# Altium PCB mcuv2.PcbDoc (part 2 of 2)
Units mil, origin at the board's own origin, x right, y up, seen from the top; angles counter-clockwise.
Board outline 3149.61 x 3149.61 mil, 2 copper layers (Top Layer, Bottom Layer); 116 components, 121 nets, 455 pads, 59 vias.
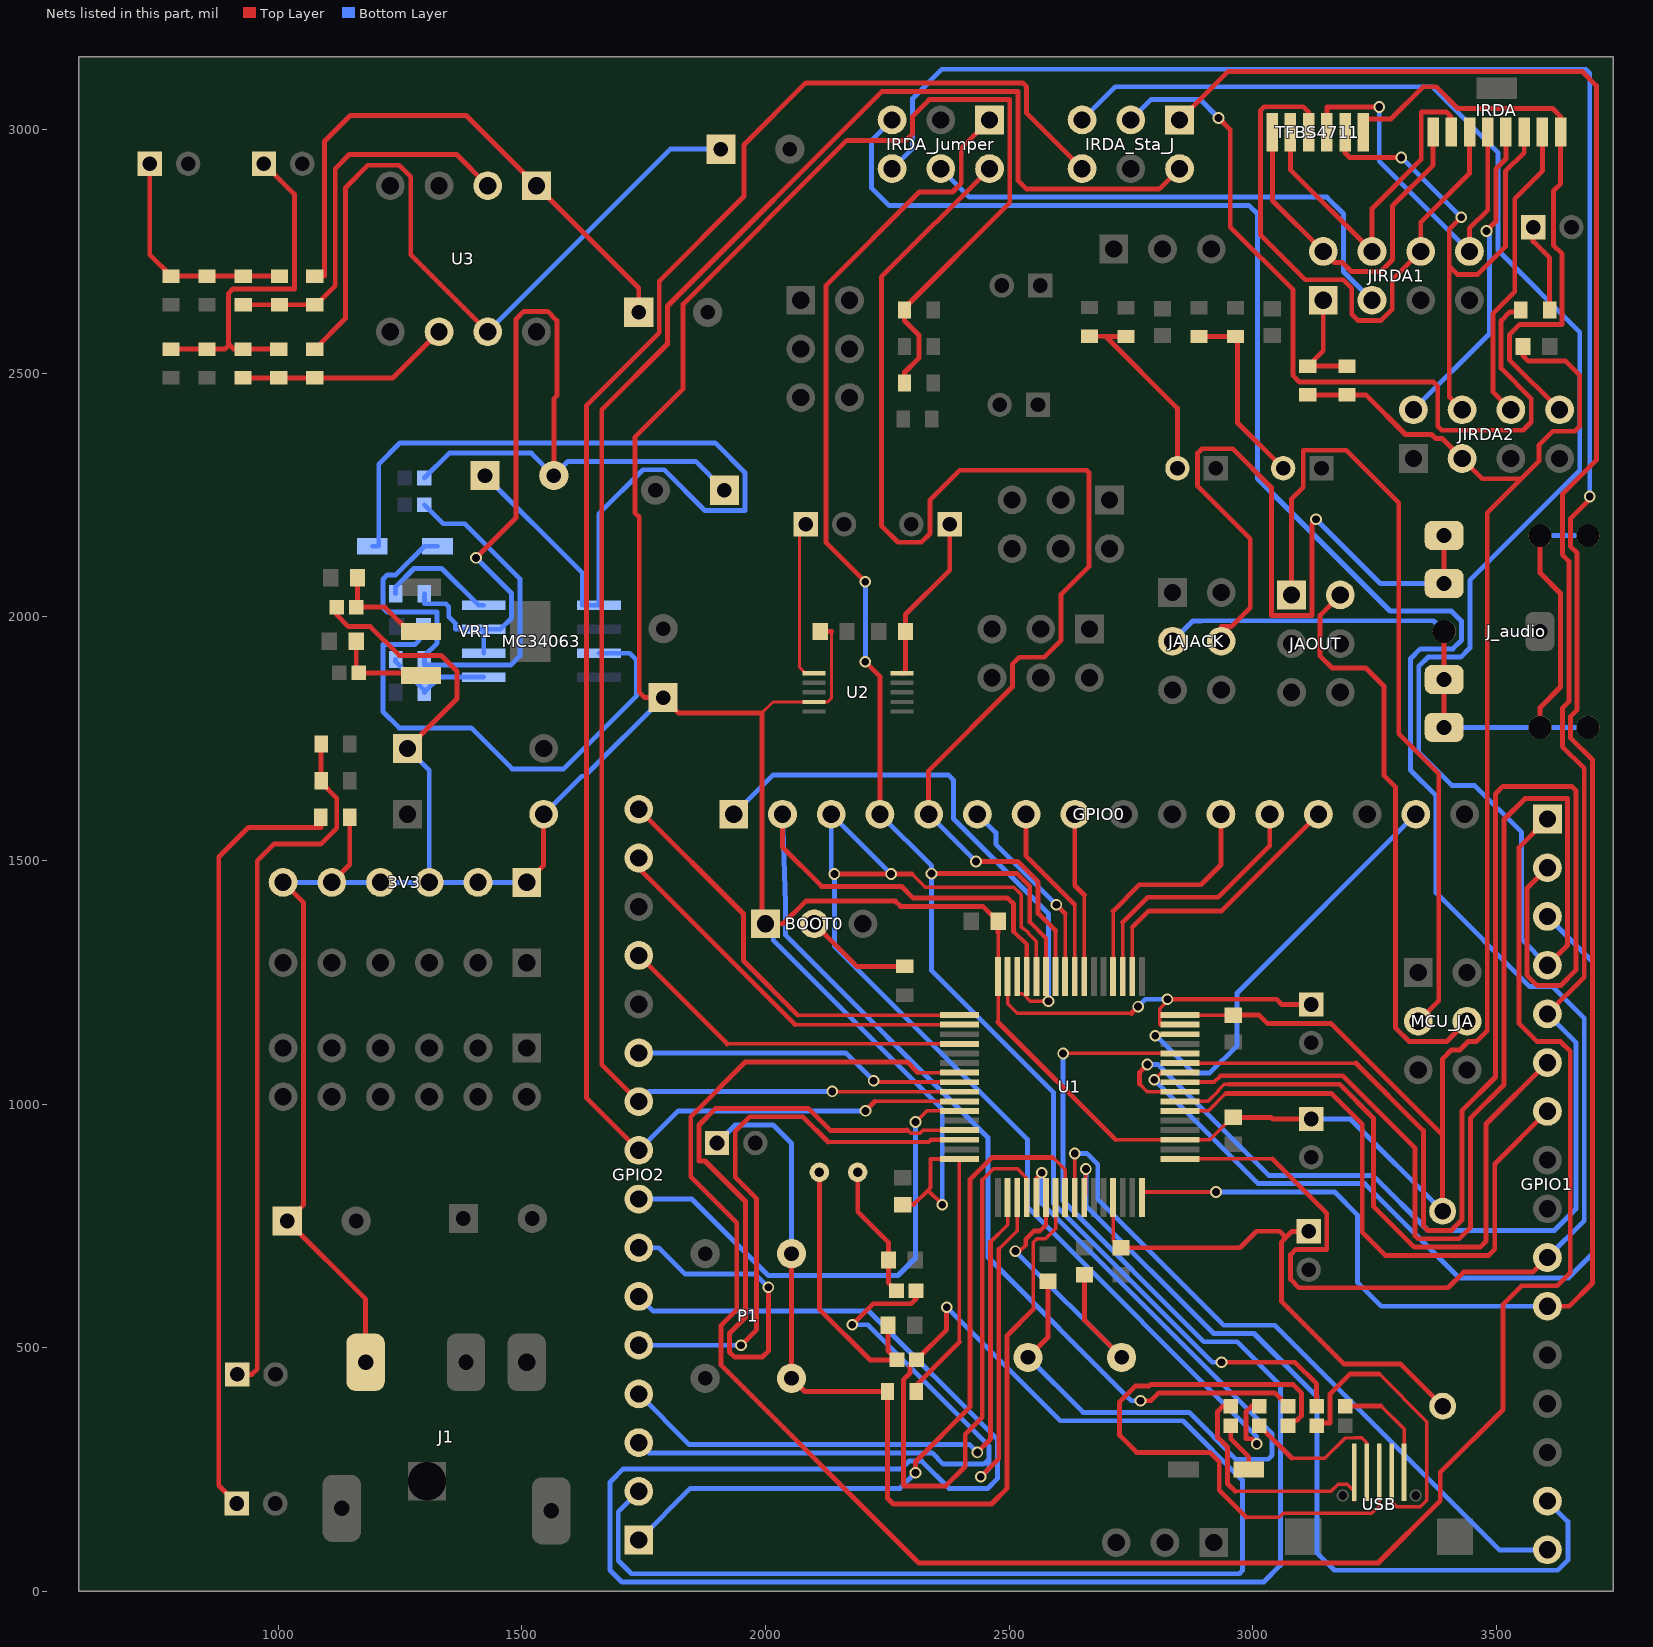
[diagram p2: the nets of this part, all layers, seen from the top]

## Via types
v1: diameter 24, hole 16, Top Layer to Bottom Layer, 59 vias

## Nets (pads, with @x,y where several pads share a name; then routed paths per layer and width w, separated by ;. In a path a pad name is that pad's centre, name@x,y a point inside that pad or via, vN(x,y) a via of type N, cw(c..) or ccw(c..) an arc to the next point about the centre after c; other vN are vias at no path point) (continued)
IRDA_SHOT: IRDA_Sta_J.3 R13.1 | length 1681.4
  Top Layer w10: v1(2930,3024) 2954,3000 2954,2800 3083,2671 3083,2495 3096,2482 3371,2482 3380,2473 3380,2391 3388,2383 3555,2383 3572,2400 3572,2448 3510.13,2509.87 3510.13,2608 3528.13,2626 3550.47,2626 R13.1@3550.47,2630
  Bottom Layer w10: IRDA_Sta_J.3@2750,3020 2792,3062 2892,3062 v1(2930,3024)
IRDA_TXD: IRDA_Jumper.4 JIRDA1.3 | length 1066.5
  Bottom Layer w10: IRDA_Jumper.4@2360,2920 2418.53,2861.47 3152.53,2861.47 3186.53,2827.47 3186.53,2708.47 JIRDA1.3@3245,2650
MCU_AOUTL: JAOUT.1 MCU_JA.3 | length 1663
  Top Layer w10: JAOUT.1@3080,2045 3080,2242 3104,2266 3104,2342 3192,2342 3300,2234 3300,1760 3382,1678 3382,1212 MCU_JA.3@3340,1170
MCU_AOUTR: JAOUT.2 MCU_JA.4 | length 1186.4
  Top Layer w10: JAOUT.2@3180,2045 3138.53,2003.53 3138.53,1986.47 3138,1985.94 3138,1920 3163,1895 3232,1895 3270,1857 3270,1674 3293,1651 3293,1157 3322,1128 3398,1128 MCU_JA.4@3440,1170
NetBOOT0_2: BOOT0.2 R3.2 | length 222.2
  Top Layer w10: BOOT0.2@2100,1370 2187.47,1282.53 R3.2@2286,1282.53
NetC6_1: C6.1 C7.2 R1.2 U1.13 | length 1075.8
  Top Layer w7.2: U1.13@2713.58,808.62 2713.58,719.45 C7.2@2728.03,705
  Top Layer w10: C7.2@2728.03,705 C7.2@2730,705 2974,705 3008,739 3055.29,739 3068.16,726.13 ; C6.1@3115,738.74 3080.77,738.74 3068.16,726.13 ; R1.2@3390,380 3303.21,466.79 3187.21,466.79 3059.43,594.57 3059.43,717.41 3068.16,726.13
NetC8_1: C8.1 U1.31 U1.47 | length 805
  Top Layer w7.2: U1.47@2497.05,1261.38 2497.05,1205.95 2517,1186 2751,1186 ; v1@2829,1215 2809.45,1195.45 2809.45,1163.1 U1.31@2851.38,1162.95
  Top Layer w10: 2751,1186 v1(2765,1200) ; v1(2825,1215) 2829,1215 3049.37,1215 3060,1204.37 C8.1@3120,1204.37
  Bottom Layer w10: v1(2765,1200) 2780,1215 v1(2825,1215)
NetC11_2: C11.2 J_VR1_IN.2 VR1.3 | length 197.2
  Top Layer w10: C11.2@1160,1950 1160,1890 J_VR1_IN.2@1165,1885 1287.24,1885 VR1.3@1292.8,1879.45
NetC12_2: C12.2 J_VR1_OUT.1 VR1.2 | length 214.6
  Top Layer w10: C12.2@1162.56,2080 1162.56,2022.56 J_VR1_OUT.1@1160,2020 1219,2020 1269,1970 VR1.2@1292.8,1970
NetC20_2: C20.2 C21.1 U2.5 | length 350.4
  Top Layer w10: U2.5@2280,1884.37 2286.99,1884.37 2287.56,1884.94 C20.2@2287.56,1970 2287.56,2005 2378.23,2095.67 C21.1@2378.23,2190
NetC22_1: C22.1 U2.6 | length 333.8
  Top Layer w6: C22.1@2070.03,2177.4 2070.03,1896.34 2082,1884.37 U2.6@2100,1884.37
  Top Layer w10: C22.1@2070.03,2177.4 C22.1@2082.63,2190
NetC25_2: C25.2 R5.2 R7.1 | length 388.2
  Top Layer w10: R5.2@2890,2575.47 R7.1@2965,2575.47 2969,2575.47 2969,2398.53 C25.2@3062.53,2305
NetC26_2: C26.2 R4.2 R6.1 | length 440.1
  Top Layer w10: R6.1@2740,2575.47 2698.53,2575.47 ; C26.2@2845.67,2305 2845.67,2428.33 2698.53,2575.47 ; 2698.53,2575.47 2698.06,2575.94 R4.2@2665,2575.94 2698.53,2575.47
NetC32_2: C32.2 MC34063.3 | length 1035.1
  Bottom Layer w10: C32.2@1298.03,1980 1298.03,1961.03 1280,1943 1215,1943 1215,1805 1248,1772 1396,1772 1480,1688 1586,1688 1735,1837 1735,1912 1721.61,1925.39 MC34063.3@1658.11,1925.39
NetC33_1: C33.1 R18.1 R19.2 R20.2 R26.2 | length 471.3
  Top Layer w10: C33.1@736.26,2930 736.26,2743.27 R18.1@780,2699.53 R19.2@853.86,2699.53 R20.2@928.29,2699.53 R26.2@1002.72,2699.53
NetC34_1: C34.1 R22.1 R23.2 R24.2 R27.2 | length 756.9
  Top Layer w10: R22.1@780,2549.53 R23.2@853.75,2549.53 890,2549.53 898,2557.53 898,2560 ; C34.1@970.63,2930 1033,2867.63 1033,2673 907,2673 898,2664 898,2560 ; R24.2@1001.25,2549.53 R27.2@927.5,2549.53 908.47,2549.53 898,2560
NetC35_1: C35.1 R25.1 U3.7 | length 1537.9
  Top Layer w10: R25.1@1075,2549.53 1138,2612.53 1138,2881 1184,2927 1248,2927 1272,2903 1272,2743 U3.7@1430,2585
  Bottom Layer w10: U3.7@1430,2585 1805,2960 C35.1@1908.6,2960
NetC36_1: C36.1 R21.1 U3.1 | length 1160.1
  Top Layer w10: R21.1@1075,2699.53 1095,2699.53 1095,2976 1148,3029 1386,3029 U3.1@1530,2885 1740,2675 C36.1@1740,2625
NetC37_1: C37.1 J_VR2_IN.1 L1.2 MC34063.6 MC34063.7 R15.2 | length 2088
  Top Layer w10: v1(1406,2121) 1488,2203 1488,2611 1504,2627 1553,2627 1572,2608 1572,2454 1565.7,2447.7 L1.2@1565.7,2290
  Bottom Layer w10: R15.2@1300,2047.5 1300,2027 1344,2027 1349.89,2021.11 1349.89,2009.2 1350,2009.09 1350,2000 1364,1986 1364,1974.61 MC34063.7@1421.89,1974.61 ; J_VR2_IN.1@1300,2285 1351,2336 1519.7,2336 L1.2@1565.7,2290 1594.7,2319 1856.7,2319 C37.1@1915.7,2260 ; v1(1406,2121) 1479,2048 1479,1997.61 1456,1974.61 MC34063.7@1421.89,1974.61 ; MC34063.6@1421.89,1925.39 MC34063.7@1421.89,1974.61
NetD1_1: D1.1 R13.2 | length 184
  Top Layer w10: D1.1@3575.63,2800 3575.63,2770.74 3609.53,2736.84 R13.2@3609.53,2630
NetD4_1: D4.1 JUSB_V5.1 | length 105.3
  Top Layer w10: JUSB_V5.1@2955,340 2955,312.93 2991.93,276 D4.1@2991.93,250
NetD5_1: D5.1 R12.2 | length 1598
  Top Layer w10: D5.1@915,180 878,217 878,1507 939,1568 1087.6,1568 R12.2@1087.6,1588.78
NetD6_1: D6.1 R13A.2 R13B.2 | length 1465.7
  Top Layer w10: D6.1@915.63,445 946,445 957,456 957,1499 992,1534 1088,1534 1120,1566 1120,1628.07 1088.07,1660 R13A.2@1088.07,1663.78 R13B.2@1088.07,1738.78
NetD7_1: D7.1 L1.1 MC34063.1 | length 1997.3
  Bottom Layer w10: D7.1@1193.16,2145 1206.18,2145 1206.18,2313.18 1250,2357 1897,2357 1958,2296 1958,2218 1876,2218 1792,2302 1748.76,2302 1658,2211.24 MC34063.1@1658,2023.82 ; L1.1@1424.3,2290 1624,2090.3 1624,2023.82 MC34063.1@1658,2023.82 ; MC34063.1@1658.11,2023.82 MC34063.1@1658,2023.82
NetD7_2: D7.2 J_VR2_OUT.1 R16.2 | length 1053.5
  Bottom Layer w10: J_VR2_OUT.1@1300,2230 1339,2191 1383.04,2191 1496,2078.04 1496,1920 1477,1901 1300,1901 R16.2@1300,1912.5 1300,1920 1326,1946 1326,2010 1224,2010 1215,2019 1215,2077 1224,2086 1241.26,2086 1300.26,2145 D7.2@1327.01,2145
NetIRDA_1: IRDA.1 JIRDA2.8 TFBS4711.6 | length 1238.5
  Top Layer w10: TFBS4711.6@3227.2,2995 3227.2,3022 3284,3022 3350,3088 3376.73,3088 3421.34,3043.39 3615.61,3043.39 3632.21,3026.79 IRDA.1@3632.21,2995 3632.21,2889 3617.37,2874.16 3617.37,2763 3635.31,2745.06 3635.31,2600.28 3548.28,2600.28 3527.13,2579.13 3527.13,2527.87 JIRDA2.8@3630,2425
NetIRDA_2: IRDA.2 JIRDA2.6 | length 627.4
  Top Layer w10: JIRDA2.6@3530,2425 3493.13,2461.87 3493.13,2622.13 3538,2667 3538,2858.2 3594.8,2915 IRDA.2@3594.8,2995
NetIRDA_3: IRDA.3 JIRDA2.4 TFBS4711.5 | length 1148.9
  Top Layer w10: TFBS4711.5@3189.8,2995 3189.8,2952 3198.8,2943 v1(3305,2943) ; v1(3428,2820) 3403.47,2795.47 3403.47,2719.53 ; JIRDA2.4@3430,2425 3403.47,2451.53 3403.47,2719.53 ; IRDA.3@3557.4,2995 3557.4,2953 3518.8,2914.4 3518.8,2759.8 3462,2703 3420,2703 3403.47,2719.53
  Bottom Layer w10: v1(3305,2943) v1(3428,2820)
NetIRDA_4: IRDA.4 JIRDA2.2 | length 654.1
  Top Layer w10: v1(3480,2792) 3499.6,2811.6 3499.6,2919.6 3520,2940 IRDA.4@3520,2995
  Bottom Layer w10: JIRDA2.2@3330,2425 3486.53,2581.53 3486.53,2785.47 v1(3480,2792)
NetIRDA_5: IRDA.5 JIRDA1.8 TFBS4711.4 | length 792.7
  Top Layer w10: TFBS4711.4@3152.4,2995 3152.4,3046.47 v1(3259.91,3046.47) ; JIRDA1.8@3445,2750 3445,2797.2 3482.6,2834.8 IRDA.5@3482.6,2995
  Bottom Layer w10: v1(3259.91,3046.47) 3259.91,2935.09 JIRDA1.8@3445,2750
NetIRDA_6: IRDA.6 JIRDA1.6 TFBS4711.3 | length 1216.5
  Top Layer w10: TFBS4711.3@3115,2995 3115,3036 3104,3047 3024,3047 3016,3039 3016,2784 3108,2692 3185.94,2692 3203.47,2674.47 3203.47,2621 3216,2608.47 3264,2608.47 3286.53,2631 3286.53,2691.53 JIRDA1.6@3345,2750 3345,2810.08 3445.2,2910.28 IRDA.6@3445.2,2995
NetIRDA_7: IRDA.7 JIRDA1.4 TFBS4711.2 | length 739.9
  Top Layer w10: TFBS4711.2@3077.6,2995 3077.6,2917.4 JIRDA1.4@3245,2750 3245,2838 3346,2939 3346,3036.53 3397.27,3036.53 3407.8,3026 IRDA.7@3407.8,2995
NetIRDA_8: IRDA.8 JIRDA1.2 TFBS4711.1 | length 754.2
  Top Layer w10: TFBS4711.1@3040.39,2995 3040.39,2854.61 JIRDA1.2@3145,2750 3168,2727 3184.47,2727 3203,2708.47 3262.47,2708.47 3287,2733 3287,2843.61 3370.39,2927 IRDA.8@3370.39,2995
NetJ_audio_2: J_audio.0 J_audio.2 J_audio.3 JAJACK.3 | length 1603.2
  Top Layer w10: J_audio.2@3393.15,1773.15 J_audio.3@3393.15,1871.57 J_audio.0@3393.15,1970 ; J_audio.0@3590,1773.15 3590,1813.97 3632,1855.97 3632,2048 3590,2090 J_audio.0@3590,2166.85
  Bottom Layer w10: JAJACK.3@2835.55,1950 2877.02,1991.47 2894.08,1991.47 2894.6,1992 3371.15,1992 J_audio.0@3393.15,1970 ; J_audio.2@3393.15,1773.15 J_audio.0@3590,1773.15 J_audio.0@3688.43,1773.15 ; J_audio.0@3590,2166.85 J_audio.0@3688.43,2166.85
NetJ_audio_3: J_audio.4 J_audio.5 JAJACK.4 | length 1618.3
  Top Layer w10: JAJACK.4@2935.55,1950 2935.55,1980 2956.04,1980 2995,2018.96 2995,2160 2887,2268 2887,2336 2896,2345 2959,2345 3038.47,2265.53 3038.47,2003 3121.53,2003 3121.53,2191.95 v1(3130,2200.43) ; J_audio.4@3393.15,2068.43 J_audio.5@3393.15,2166.85
  Bottom Layer w10: v1(3130,2200.43) 3262,2068.43 J_audio.4@3393.15,2068.43
NetJIRDA1_1: JIRDA1.1 R8A.1 R8B.1 | length 229.4
  Top Layer w10: JIRDA1.1@3145,2650 3145,2546.45 R8B.1@3113.08,2514.53 R8A.1@3193.78,2514.53
NetJUSB_DM_2: JUSB_DM.2 USB.4 | length 330.5
  Top Layer w7: 3080.75,273 3148.16,273 3189.66,314.5 3209.35,314.5 3209.85,315 3224,315 3234.21,304.79 USB.4@3234.21,244.15
  Top Layer w10: JUSB_DM.2@3013.75,340 3080.75,273
NetJUSB_DP_2: JUSB_DP.2 USB.3 | length 1261.5
  Top Layer w7: 2987,152 3054.69,152 3062.54,159.85 3244.85,159.85 3259.8,174.8 USB.3@3259.8,244.15
  Top Layer w10: 2987,152 2931.43,207.57 2931.43,265.57 2912,285 2762,285 2727,320 2727,388.96 2759.04,421 2787.06,421 2790.06,424 3083,424 3100,407 3100,360 3090,350 3082.5,350 JUSB_DP.2@3072.5,340
NetJUSB_GND_2: JUSB_GND.2 USB.1 | length 229.3
  Top Layer w7: 3264,380 3310.98,333.02 USB.1@3310.98,244.15
  Top Layer w10: JUSB_GND.2@3190,380 3264,380
NetJUSB_OTG_2: JUSB_OTG.2 USB.2 | length 649.2
  Top Layer w7: 3259.58,446 3357.61,347.98 3357.61,187.07 3344.13,173.6 3295.8,173.6 3285.39,184 USB.2@3285.39,244.15
  Top Layer w10: JUSB_OTG.2@3131.25,340 3136.25,345 3159,345 3159,405 3200,446 3259.58,446
NetJUSB_V5_2: JUSB_V5.2 USB.5 | length 484.9
  Top Layer w7: 2964.43,205 3160.88,205 3175.47,219.6 3194.53,219.6 3208,206.12 USB.5@3208,187.07
  Top Layer w10: JUSB_V5.2@2955,380 2939,380 2928,369 2928,315.89 2948.43,295.46 2948.43,221 2964.43,205
NetMC34063_5: MC34063.5 R16.1 R17.2 | length 226.8
  Bottom Layer w10: R16.1@1240.94,1912.5 1240.94,1908.06 1300,1849 R17.2@1300,1845 1331.18,1876.18 MC34063.5@1421.89,1876.18
NetMC34063_8: MC34063.8 R15.1 | length 241.9
  Bottom Layer w10: R15.1@1240.94,2047.5 1240.94,2061.65 1278.56,2099.27 1335.73,2099.27 1411.18,2023.82 MC34063.8@1421.89,2023.82
NetR20_1: R20.1 R21.2 R26.1 U3.2 | length 796.9
  Top Layer w10: R20.1@928.29,2640.47 R26.1@1002.72,2640.47 R21.2@1075,2640.47 1078,2640.47 1117,2679.47 1117,2920 1146,2949 1366,2949 U3.2@1430,2885
NetR24_1: R24.1 R25.2 R27.1 U3.6 | length 441.7
  Top Layer w10: R27.1@927.5,2490.47 R24.1@1001.25,2490.47 R25.2@1075,2490.47 1235.47,2490.47 U3.6@1330,2585
OSC32_IN: C18.2 JO32I.2 Y2.1 | length 562.2
  Top Layer w10: Y2.1@2110.63,860 2110.63,578.94 2214.57,475 JO32I.2@2270,475 2251.44,493.56 C18.2@2251.44,546
OSC32_OUT: C19.2 JO32O.2 Y2.2 | length 276
  Top Layer w10: Y2.2@2189.37,860 2189.37,779.07 2252.44,716 C19.2@2252.44,680 2252.44,633.56 JO32O.2@2269,617
OSC_IN: C16.2 U1.5 Y1.1 | length 1595.2
  Top Layer w7.2: U1.5@2556.1,808.62 2556.1,848.1 v1(2567,859)
  Top Layer w10: Y1.1@2538.94,480 2580,521.06 C16.2@2580,636.44
  Bottom Layer w10: Y1.1@2538.94,480 2651.94,367 2869.56,367 2965.56,271 3032,271 3040,279 3040,323.03 2567,796.03 v1(2567,859)
OSC_OUT: C17.2 U1.6 Y1.2 | length 658.6
  Top Layer w8.4: v1@2521.53,698.06 2534.4,710.93 ; 2563.07,739.6 2565.89,742.42 2566.74,742.42 2573.3,748.98 2573.3,749.83 2575.79,752.32 U1.6@2575.79,808.62
  Top Layer w10: v1(2513,698.06) v1@2521.53,698.06 ; 2534.4,710.93 2534.4,722.46 2551.54,739.6 2563.07,739.6 ; C17.2@2655,649.88 2655,556.06 Y1.2@2731.06,480
  Bottom Layer w10: v1(2513,698.06) Y1.2@2731.06,480
PA2: GPIO1.11 IRDA_Jumper.6 U1.16 | length 5242.7
  Top Layer w8.4: U1.16@2772.64,808.62 2772.64,819.63 v1(2924.83,819.63)
  Top Layer w10: GPIO1.11@3605,585 3649.92,585 3697.53,632.61 3697.53,1706.47 3652.8,1751.2 3652.8,1795.8 3666,1809 3666,2131 3652.8,2144.2 3652.8,2202 3692,2241.2 v1(3692,2247.1)
  Bottom Layer w10: IRDA_Jumper.6@2260,2920 2302,2962 2302,3064 2362,3124 3684.03,3124 ; v1(2924.83,819.63) 3168,819.63 3215,772.63 3215,634 3264,585 GPIO1.11@3605,585 ; 3684.03,3123.97 3692,3116 v1(3692,2247.1)
PA3: GPIO1.10 IRDA_Jumper.5 U1.17 | length 4760
  Top Layer w7.2: U1.17@2851.38,887.36 3040.64,887.36
  Top Layer w10: 3040.64,887.36 3152,776 3152,701.74 3088.74,701.74 3078,691 3078,640 3095,623 3401,623 3433,655 3575,655 GPIO1.10@3605,685
  Bottom Layer w10: IRDA_Jumper.5@2260,3020 2218,2978 2218,2880 2254,2844 2993,2844 3010,2827 3010,2284 3282,2012 3408,2012 3428.77,1991.23 3428.77,1952 3411.15,1934.38 3344,1934.38 3324,1914.38 3324,1685 3376.53,1632.47 3376.53,1433.47 3569,1241 3616,1241 3680.53,1176.47 3680.53,760.53 GPIO1.10@3605,685
PA6: GPIO1.7 U1.22 | length 1261.5
  Top Layer w7.2: U1.22@2851.38,985.79 2908.79,985.79 2945,1022
  Top Layer w10: 2945,1022 3161.54,1022 3225,958.54 3225,737 3273,689 3484,689 3497,702 3497,877 GPIO1.7@3605,985
PA7: GPIO1.6 U1.23 | length 1311.5
  Top Layer w7.2: U1.23@2851.38,1005.47 2908.39,1005.47 2929.4,1026.48 2929.4,1028.46 2941.46,1040.52 2950.52,1040.52
  Top Layer w10: 2950.52,1040.52 3178.54,1040.52 3247.8,971.26 3247.8,790.4 3331.76,706.44 3467.26,706.44 3479,718.18 3479,959 GPIO1.6@3605,1085
PA8: GPIO0.6 U1.41 | length 408.2
  Top Layer w7.2: U1.41@2615.16,1261.38 2615.16,1391
  Top Layer w10: v1(2597.16,1409) 2615.16,1391
  Bottom Layer w10: GPIO0.6@2435,1595 2472.94,1557.06 2472.94,1533.22 v1(2597.16,1409)
PA9: GPIO0.5 IRDA_Jumper.2 U1.42 | length 2727.6
  Top Layer w8.4: U1.42@2595.47,1261.38 2595.47,1355.53
  Top Layer w10: GPIO0.5@2335,1595 2335,1684 2507,1856 2507,1903 2521,1917 2572,1917 2607,1952 2607,2046 2664,2103 2664,2296 2659,2301 2399,2301 2338,2240 2338,2171 2320,2153 2272,2153 2238,2187 2238,2698 IRDA_Jumper.2@2460,2920 ; v1(2432,1498) 2517.6,1498 2559.6,1456 2559.6,1391.4 2595.47,1355.53
  Bottom Layer w10: GPIO0.5@2335,1595 v1(2432,1498)
PA10: GPIO0.4 IRDA_Jumper.1 JUSB_OTG.1 U1.43 | length 3747.5
  Top Layer w8.4: 2542.6,1373.5 2575.79,1340.32 U1.43@2575.79,1261.38
  Top Layer w10: v1(2205,1908) 2235,1878 GPIO0.4@2235,1595 ; v1(2205,2072) 2124,2153 2124,2680 2316,2872 2384,2872 2402,2890 2402,2962 IRDA_Jumper.1@2460,3020 ; v1(2341,1473) 2516.83,1473 2542.6,1447.23 2542.6,1373.5 ; v1(2936.07,470) 3086.77,470 3131.25,425.52 JUSB_OTG.1@3131.25,380
  Bottom Layer w10: v1(2205,1908) v1(2205,2072) ; GPIO0.4@2235,1595 2341,1489 v1(2341,1473) 2341,1274 2591,1024 2591,796.07 2917.07,470 v1(2936.07,470)
PA11: GPIO0.3 JUSB_DM.1 U1.44 | length 2526.6
  Top Layer w7.2: 2301,1472 2328,1445 2510,1445 2525,1430 2525,1363.13 2539.38,1352.68 2539.38,1350.7 2556.1,1333.98 U1.44@2556.1,1261.38
  Top Layer w10: v1(2141.53,1472) v1(2258,1472) 2301,1472 ; v1(3008.5,302.5) 2998,313 2986,313 2986,368 2998,380 JUSB_DM.1@3013.75,380
  Bottom Layer w10: v1(2258,1472) GPIO0.3@2135,1595 2135,1478.53 v1(2141.53,1472) 2141.53,1323.47 2538,927 2538,788 3008.5,317.5 v1(3008.5,302.5)
  other v1: 2141.53,1472
PA12: GPIO0.2 JUSB_DP.1 U1.45 | length 2588.3
  Top Layer w8.4: 2509.4,1354.17 2536.42,1327.15 U1.45@2536.42,1261.38
  Top Layer w10: GPIO0.2@2035,1595 2035,1527 2115.2,1446.8 2279.2,1446.8 2303.28,1422.72 2497.18,1422.72 2509.4,1410.51 2509.4,1354.17 ; v1(2770,391) 2791.06,391 2807.06,407 3045.5,407 JUSB_DP.1@3072.5,380
  Bottom Layer w10: GPIO0.2@2035,1595 2041.53,1412 2041.53,1346.47 2456.78,931.22 2456.78,685.22 2751,391 v1(2770,391)
PA13: GPIO0.1 U1.46 | length 1127.4
  Top Layer w7.2: U1.46@2516.73,1261.38 2516.73,1228.06 2530.42,1224.98 2543.64,1210.78 v1(2581,1210.78)
  Bottom Layer w10: GPIO0.1@1935,1595 2015,1675 2376,1675 2386,1665 2386,1585.27 2581,1390.27 v1(2581,1210.78)
PA14: GPIO2.16 U1.49 | length 889.8
  Top Layer w7.2: 2066.36,1182.64 U1.49@2398.62,1182.64
  Top Layer w10: GPIO2.16@1740,1605 1955,1390 1955,1294 2066.36,1182.64
PA15: GPIO2.15 U1.50 | length 812.6
  Top Layer w7.2: 2061.05,1162.95 U1.50@2398.62,1162.95
  Top Layer w10: GPIO2.15@1740,1505 1740,1484 2061.05,1162.95
PB0: GPIO1.3 U1.26 | length 1878.8
  Top Layer w7.2: v1(2798,1050) 2812.53,1064.53 U1.26@2851.38,1064.53
  Bottom Layer w10: v1(2798,1050) 3011.37,836.63 3230.38,836.63 3424.01,643 3648,643 3697.53,692.53 3697.53,1292.47 GPIO1.3@3605,1385
PB1: GPIO1.2 U1.27 | length 2651.8
  Top Layer w7.2: U1.27@2851.38,1084.21 3211.79,1084.21
  Top Layer w10: 3211.79,1084.21 3350.44,945.56 3350.44,750 3360,740.44 3408,740.44 3429.56,762 3429.56,986.56 3498.53,1055.53 3498.53,1637 3513.53,1652 3655.33,1652 3663.53,1643.81 3663.53,1274.53 3632,1243 3584,1243 3563.47,1263.53 3563.47,1443.47 GPIO1.2@3605,1485
PB2: GPIO1.1 U1.55 | length 4515.8
  Top Layer w7.2: 2312.87,1064.53 U1.55@2398.62,1064.53
  Top Layer w10: 2312.87,1064.53 2290.97,1086.43 1959.06,1086.43 1846.63,974 1846.63,850.95 1941,756.58 1941,578 1909,546 1909,464 2315,58 3257.31,58 3385,185.69 3385,244 3514,373 3514,589 3552,627 3625,627 3652,654 3652,1108 3632,1128 3584,1128 3546.47,1165.53 3546.47,1526.47 GPIO1.1@3605,1585
PB3: GPIO2.11 U1.56 | length 683.5
  Top Layer w8.4: v1@2225.16,1044.84 U1.56@2398.62,1044.84
  Top Layer w10: v1(2222,1048) v1@2225.16,1044.84
  Bottom Layer w10: GPIO2.11@1740,1105 2165,1105 v1(2222,1048)
PB4: GPIO2.10 IRDA_Sta_J.2 U1.57 | length 3829.2
  Top Layer w7.2: v1(2137,1026) 2137.42,1025.58 2137.84,1025.16 U1.57@2398.62,1025.16
  Top Layer w10: GPIO2.10@1740,1005 1664,1081 1664,2425 1799,2560 1799,2638 2239.53,3078.53 2518.53,3078.53 2518.53,2895.47 2536,2878 2808,2878 IRDA_Sta_J.2@2850,2920
  Bottom Layer w10: GPIO2.10@1740,1005 1761,1026 v1(2137,1026)
PB5: GPIO2.9 IRDA_Sta_J.6 U1.58 | length 3793.5
  Top Layer w7.2: 2224.91,1005.47 U1.58@2398.62,1005.47
  Top Layer w10: GPIO2.9@1740,905 1633,1012 1633,2434 1782,2583 1782,2689 1956,2863 1956,2969 2083,3096 2528,3096 2536,3088 2536,3034 IRDA_Sta_J.6@2650,2920 ; v1(2205.44,986) 2224.91,1005.47
  Bottom Layer w10: GPIO2.9@1740,905 1821,986 v1(2205.44,986)
PB6: GPIO2.8 U1.59 | length 1027
  Top Layer w7.2: v1(2308,963) 2330.79,985.79 U1.59@2398.62,985.79
  Bottom Layer w10: GPIO2.8@1740,805 1849,805 2006,648 2272,648 2308,684 v1(2308,963)
PB7: GPIO2.7 U1.61 | length 1618.9
  Top Layer w7.2: 2290.63,946.42 2292.62,946.42 2298.64,940.4 2317.36,940.4 2323.38,946.42 U1.61@2398.62,946.42
  Top Layer w10: v1(2006,623.95) 2006,493 1994,481 1936,481 1926,491 1926,529 1959,562 1959,800 1876,883 1863.63,883 1863.63,957 1897.63,991 2088,991 2133,946 2290.21,946 2290.63,946.42
  Bottom Layer w10: GPIO2.7@1740,705 1780.95,705 1835,650.95 1979,650.95 v1(2006,623.95)
PB8: GPIO2.6 U1.28 | length 4879.6
  Top Layer w7.2: v1(2611,1103.9) U1.28@2851.38,1103.9
  Bottom Layer w10: GPIO2.6@1740,605 1770,575 2212.65,575 2476,311.65 2476,230.86 2456,210.86 2377.14,210.86 2321,267 2295,267 2279,251 1708,251 1681,224 1681,43 1705,19 3023,19 3057,53 3057,423 2968,512 2900,512 2610.84,801.16 2610.84,1103.74 v1(2611,1103.9)
PB9: GPIO2.5 U1.62 | length 1177
  Top Layer w8.4: 2129,922 2335.3,922 2340.03,926.73 U1.62@2398.62,926.73
  Top Layer w10: v1(1950,505) 1982,537 1982,806 1938,850 1938,944 1968,974 2077,974 2129,922
  Bottom Layer w10: GPIO2.5@1740,505 v1(1950,505)
PB11: GPIO0.15 U1.30 | length 905.2
  Top Layer w7.2: v1@2799.09,1143.27 U1.30@2851.38,1143.27
  Bottom Layer w10: v1@2800,1142.36 v1(2800,1140) 2801,1141 2878,1064 2912,1064 2968,1120 2968,1228 GPIO0.15@3335,1595
PB13: GPIO0.13 U1.34 | length 579.5
  Top Layer w7.2: U1.34@2752.95,1261.38 2752.95,1362.47
  Top Layer w10: 2752.95,1362.47 2786.95,1396.47 2936.47,1396.47 GPIO0.13@3135,1595
PB14: GPIO0.12 U1.35 | length 543.5
  Top Layer w7.2: U1.35@2733.27,1261.38 2733.27,1373.27
  Top Layer w10: 2733.27,1373.27 2784.39,1424.39 2929.39,1424.39 3035,1530 GPIO0.12@3035,1595
PB15: GPIO0.11 U1.36 | length 499.4
  Top Layer w7.2: U1.36@2713.58,1261.38 2713.58,1396
  Top Layer w10: 2713.58,1396 2767.58,1450 2894,1450 2935,1491 GPIO0.11@2935,1595
PC0: GPIO2.1 U1.8 | length 1554.8
  Top Layer w7.2: 2589.5,890.6 2615.16,864.95 U1.8@2615.16,808.62
  Top Layer w10: v1(2308,243) 2308,266.17 2419.5,377.67 2419.5,844.86 2465.24,890.6 2589.5,890.6
  Bottom Layer w10: GPIO2.1@1740,105 1846,211 2276,211 v1(2308,243)
PC1: GPIO1.16 U1.9 | length 1439.3
  Top Layer w7.2: U1.9@2634.84,808.62 v1(2634.84,898.62)
  Bottom Layer w10: v1(2634.84,898.62) 2659.84,898.62 2682,876.46 2682,804.61 2940.61,546 3045.56,546 3506.56,85 GPIO1.16@3605,85
PC2: GPIO1.15 U1.10 | length 1769.1
  Top Layer w7.2: U1.10@2654.53,808.62 2657.61,811.71 v1@2657.61,866.61
  Bottom Layer w10: v1@2657.61,866.61 2657.76,866.76 2657.76,791.36 2920.12,529 3002.75,529 3132,399.75 3132,79 3168,43 3626,43 3647,64 3647,143 GPIO1.15@3605,185
  other v1: 2657.69,866.69
PC4: GPIO1.5 IRDA_Sta_J.1 U1.24 | length 4503.5
  Top Layer w7.2: 2768,1041.16 2784,1025.16 U1.24@2851.38,1025.16
  Top Layer w10: 2768,1041.16 2768,1065 v1(2784,1081) ; IRDA_Sta_J.1@2850,3020 2949,3119 3677,3119 3705.53,3090.47 3705.53,2321.53 3635.8,2251.8 3635.8,2127.42 3649,2114.23 3649,1825.77 3635.8,1812.58 3635.8,1733.72 3680.53,1689 3680.53,1260.53 GPIO1.5@3605,1185
  Bottom Layer w10: v1(2784,1081) 2805.93,1081 3033.3,853.63 3246.81,853.63 3360,740.44 3619.44,740.44 3663.53,784.53 3663.53,1126.47 GPIO1.5@3605,1185
PC5: GPIO1.4 IRDA_Sta_J.5 U1.25 | length 5216.3
  Top Layer w8.4: U1.25@2851.38,1044.84 2920.89,1044.84 2934.05,1058
  Top Layer w10: 2934.05,1058 3185.11,1058 3333,910.11 3333,730 3339.56,723.44 3424,723.44 3447,746.44 3447,971 3516,1040 3516,1584 3559,1627 3646.53,1627 3646.53,1326.53 GPIO1.4@3605,1285
  Bottom Layer w10: IRDA_Sta_J.5@2650,3020 2718,3088 3368.39,3088 3504,2952.39 3504,2752 3671.53,2584.47 3671.53,2300.53 3445.77,2074.77 3445.77,1936 3427.15,1917.38 3360,1917.38 3341,1898.38 3341,1722 3409.47,1653.53 3456,1653.53 3552,1557.53 3552,1338 GPIO1.4@3605,1285
PC8: GPIO0.8 U1.39 | length 341.7
  Top Layer w7.2: U1.39@2654.53,1261.38 2654.53,1429
  Top Layer w10: GPIO0.8@2635,1595 2635,1448.53 2654.53,1429
PC9: GPIO0.7 U1.40 | length 375
  Top Layer w7.2: U1.40@2634.84,1261.38 2634.84,1409.16
  Top Layer w10: GPIO0.7@2535,1595 2535,1509 2634.84,1409.16
PC11: GPIO2.13 U1.52 | length 733.8
  Top Layer w7.2: 1921.42,1123.58 U1.52@2398.62,1123.58
  Top Layer w10: GPIO2.13@1740,1305 1921.42,1123.58
PC13: GPIO2.4 U1.2 | length 1294
  Top Layer w7.2: 2462,716.95 2497.05,752 U1.2@2497.05,808.62
  Top Layer w10: v1(2435,285) 2462,312 2462,716.95
  Bottom Layer w10: GPIO2.4@1740,405 1844,301 2419,301 v1(2435,285)
PC14: GPIO2.3 JO32O.1 U1.3 | length 1970.5
  Top Layer w7.2: 2479,702.13 2516.73,739.86 U1.3@2516.73,808.62
  Top Layer w10: v1(2178,547) 2221,590 2299,590 2309,600 JO32O.1@2309,617 ; v1(2442,235) 2479,272 2479,702.13
  Bottom Layer w10: GPIO2.3@1740,305 1761,284 2342,284 2365,261 2448,261 2459,272 ; v1(2178,547) 2210,547 2459,298 2459,272 ; v1(2442,235) 2459,252 2459,272
PC15: GPIO2.2 JO32I.1 U1.4 | length 3690.9
  Top Layer w7.2: 2445,844 2468,867 2517.42,867 2536.42,848 U1.4@2536.42,808.62
  Top Layer w10: v1(2372,583) 2372,537 JO32I.1@2310,475 2297,462 2297,448 2283,434 2283,218 2284.77,216.23 2370.23,216.23 2410,256 2410,322 2445,357 2445,844
  Bottom Layer w10: GPIO2.2@1740,205 1698,163 1698,63 1725,36 2973.04,36 2979,41.96 2979,228 2857,350 2605,350 v1(2372,583)
RESET: C9.1 P1.1 P1.2 R2.1 U1.7 | length 2006.4
  Top Layer w7.2: 2550,579 2550,716 2558,724 2575.47,724 2595.47,744 U1.7@2595.47,808.62
  Top Layer w10: P1.1@2053.58,692.95 P1.2@2053.58,437.05 2080.63,410 R2.1@2250.47,410 2250.47,190.53 2262,179 2464,179 2496,211 2496,525 2550,579
  Bottom Layer w10: C9.1@1900.63,920 1937.63,957 2016,957 2053.58,919.42 P1.1@2053.58,692.95
VCC: 3V3.1 3V3.2 3V3.3 3V3.4 3V3.5 3V3.6 BOOT0.1 C1.1 C2.2 C3.2 C4.2 C5.2 C13.1 C23.2 C24.1 C31.2 D2.2 D3.1 J1.3 J_VR1_OUT.2 JIRDA2.3 R1.1 R2.2 R8.1 R8A.2 R8B.2 R10.1 R12.1 U1.19 U1.32 U1.48 U1.64 U2.9 | length 12968.5
  Top Layer w6: 2015.31,1825.31 U2.9@2100,1825.31 2128,1825.31 2136,1833.31 2136,1970
  Top Layer w6.2: 1993,1803 2015.31,1825.31
  Top Layer w7.2: 2398,511.19 2398,887.36 U1.64@2398.62,887.36 ; 2477.36,1168.3 U1.48@2477.36,1261.38 2477.36,1352.36 ; 2718.93,926.73 U1.19@2851.38,926.73 2912.2,926.73 C3.2@2958.03,972.56 ; U1.32@2851.38,1182.64 C2.2@2960,1182.56 C2.2@2960,1182.56
  Top Layer w8.4: 2304,793.44 2333.5,822.94 ; v1(2363,793.44) 2333.5,822.94 ; U1.64@2398,887.36 2339,887.36 2339,828.44 2333.5,822.94
  Top Layer w10: 3V3.6@1010,1455 1052,1413 1052,793.4 C13.1@1018.6,760 1179.29,599.31 J1.3@1179.29,470 ; 3V3.5@1110,1455 1146.65,1491.65 R12.1@1146.65,1588.78 ; J_VR1_OUT.2@1120,2020 1120,2004 1144,1980 1189,1980 1248,1921 1334,1921 1367,1888 1367,1831.76 D2.2@1265.24,1730 ; 3V3.1@1510,1455 1544.76,1489.76 D3.1@1544.76,1595 ; C23.2@2112.44,1970 2136,1970 ; C4.2@2282,793.44 2304,793.44 ; R8.1@2285.47,2480 2285.47,2501.47 2315,2531 2315,2578.47 2285.47,2608 R10.1@2285.47,2630 2285.47,2634 2501.53,2850.06 2501.53,3061.53 2336,3061.53 2302,3027.53 2302,2992 2288,2978 2167,2978 1831,2642 1831,2468 1732,2369 1732,2214 1741,2205 1741,1845.3 1752,1834.3 C24.1@1790,1834.3 1821.3,1803 1993,1803 BOOT0.1@1993,1377 ; R2.2@2309.53,410 2309.53,422.72 2398,511.19 ; 2477.36,1168.3 2718.93,926.73 ; 2477.36,1352.36 2477.56,1352.56 C5.2@2477.56,1375 2477,1375 2446.28,1405.72 2277.52,1405.72 2266.61,1416.63 2082.63,1416.63 2036,1370 BOOT0.1@2000,1370 ; C3.2@2958.03,972.56 C3.2@2960,972.56 3038,972.56 3041.19,969.37 C1.1@3120,969.37 ; C2.2@2960,1182.56 3013.44,1182.56 3031,1165 3161,1165 3390,936 ; R8B.2@3113.08,2455.47 R8A.2@3193.78,2455.47 3232.53,2455.47 3313.67,2374.33 3367.17,2374.33 3375.5,2366 3389,2366 JIRDA2.3@3430,2325 3471.53,2283.47 3551.47,2283.47 ; R1.1@3390,780 3390,936 ; C31.2@3554.88,2555 3554.88,2536 3565.88,2525 3642.53,2525 3671.53,2496 3671.53,2391.53 3661,2381 3616,2381 3588,2353 3588,2320 3551.47,2283.47 ; BOOT0.1@1993,1377 1993,1370 BOOT0.1@2000,1370 ; BOOT0.1@1993,1377 BOOT0.1@2000,1370 ; 3390,936 3390,1093 3408,1111 3425,1111 3442,1128 3459,1128 3481.53,1150.53 3481.53,2213.53 3551.47,2283.47
  Bottom Layer w10: 3V3.6@1010,1455 3V3.5@1110,1455 3V3.4@1210,1455 3V3.3@1310,1455 ; D2.2@1265.24,1730 1310,1685.24 3V3.3@1310,1455 ; 3V3.1@1510,1455 3V3.2@1410,1455 3V3.3@1310,1455 ; D3.1@1544.76,1595 1622.66,1672.89 1628.59,1672.89 C24.1@1790,1834.3 ; BOOT0.1@2000,1370 2016,1370 2016,1336 2363,989 v1(2363,793.44) ; C1.1@3120,969.37 3200.63,969.37 R1.1@3390,780
pads on no net: J1.4 J1.5 J1.6 PWRJ5.3 U1.1 U1.54 USB. USB.MH1 USB.MH2 VR1.4

## Polygon pours and split planes (outlines as drawn)
GND on Top Layer "Top Layer-No Net" (solid, remove dead copper, pour order 8): 590.55,0 590.55,3149.61 3740.16,3149.61 3740.16,0
VCC on Bottom Layer "Top Layer-No Net1" (solid, remove dead copper, pour order 9): 590.55,0 590.55,3149.61 3740.16,3149.61 3740.16,0

## Silkscreen, mask and mechanical layers (free items; w line width, h text height)
Top Overlay:
  text "M" at 3250,2035 h60
  text "D" at 3250,1825 h60
Mechanical 1:
  the board outline again, w10

## Text inside footprints (layer, text, board x,y; h text height)
IRDA_Jumper: Top Overlay "6" at 2200,2940 h60 r180; Top Overlay "5" at 2200,3040 h60 r180
JAOUT: Top Overlay "R" at 3160,1785 h60 r270; Top Overlay "L" at 3060,1785 h60 r270
MCU_JA: Top Overlay "R" at 3420,1010 h60 r270; Top Overlay "L" at 3320,1010 h60 r270
U1: Mechanical 7 "Default Padstyle: RX47Y12D0T" at 3134.88,685 h60 r90; Mechanical 7 "Alt 1 Padstyle: OX60Y90D30P" at 3314.88,697.5 h60 r90; Mechanical 7 "Alt 2 Padstyle: OX90Y60D30P" at 3374.88,697.5 h60 r90; Mechanical 7 "0.02in/0.5mm" at 2499.7,570.12 h60 r90; Mechanical 7 "0.453in/11.5mm" at 2637.5,1349.88 h60 r90; Mechanical 7 "0.453in/11.5mm" at 2979.88,947.5 h60 r90